# Altium PCB INSGPS.PcbDoc
Units mm, origin at the board's own origin, x right, y up, seen from the top; angles counter-clockwise.
Board outline 35 x 35 mm, 2 copper layers (Top Layer, Bottom Layer), stack 1.581 mm thick; 48 components, 44 nets, 286 pads, 62 vias.
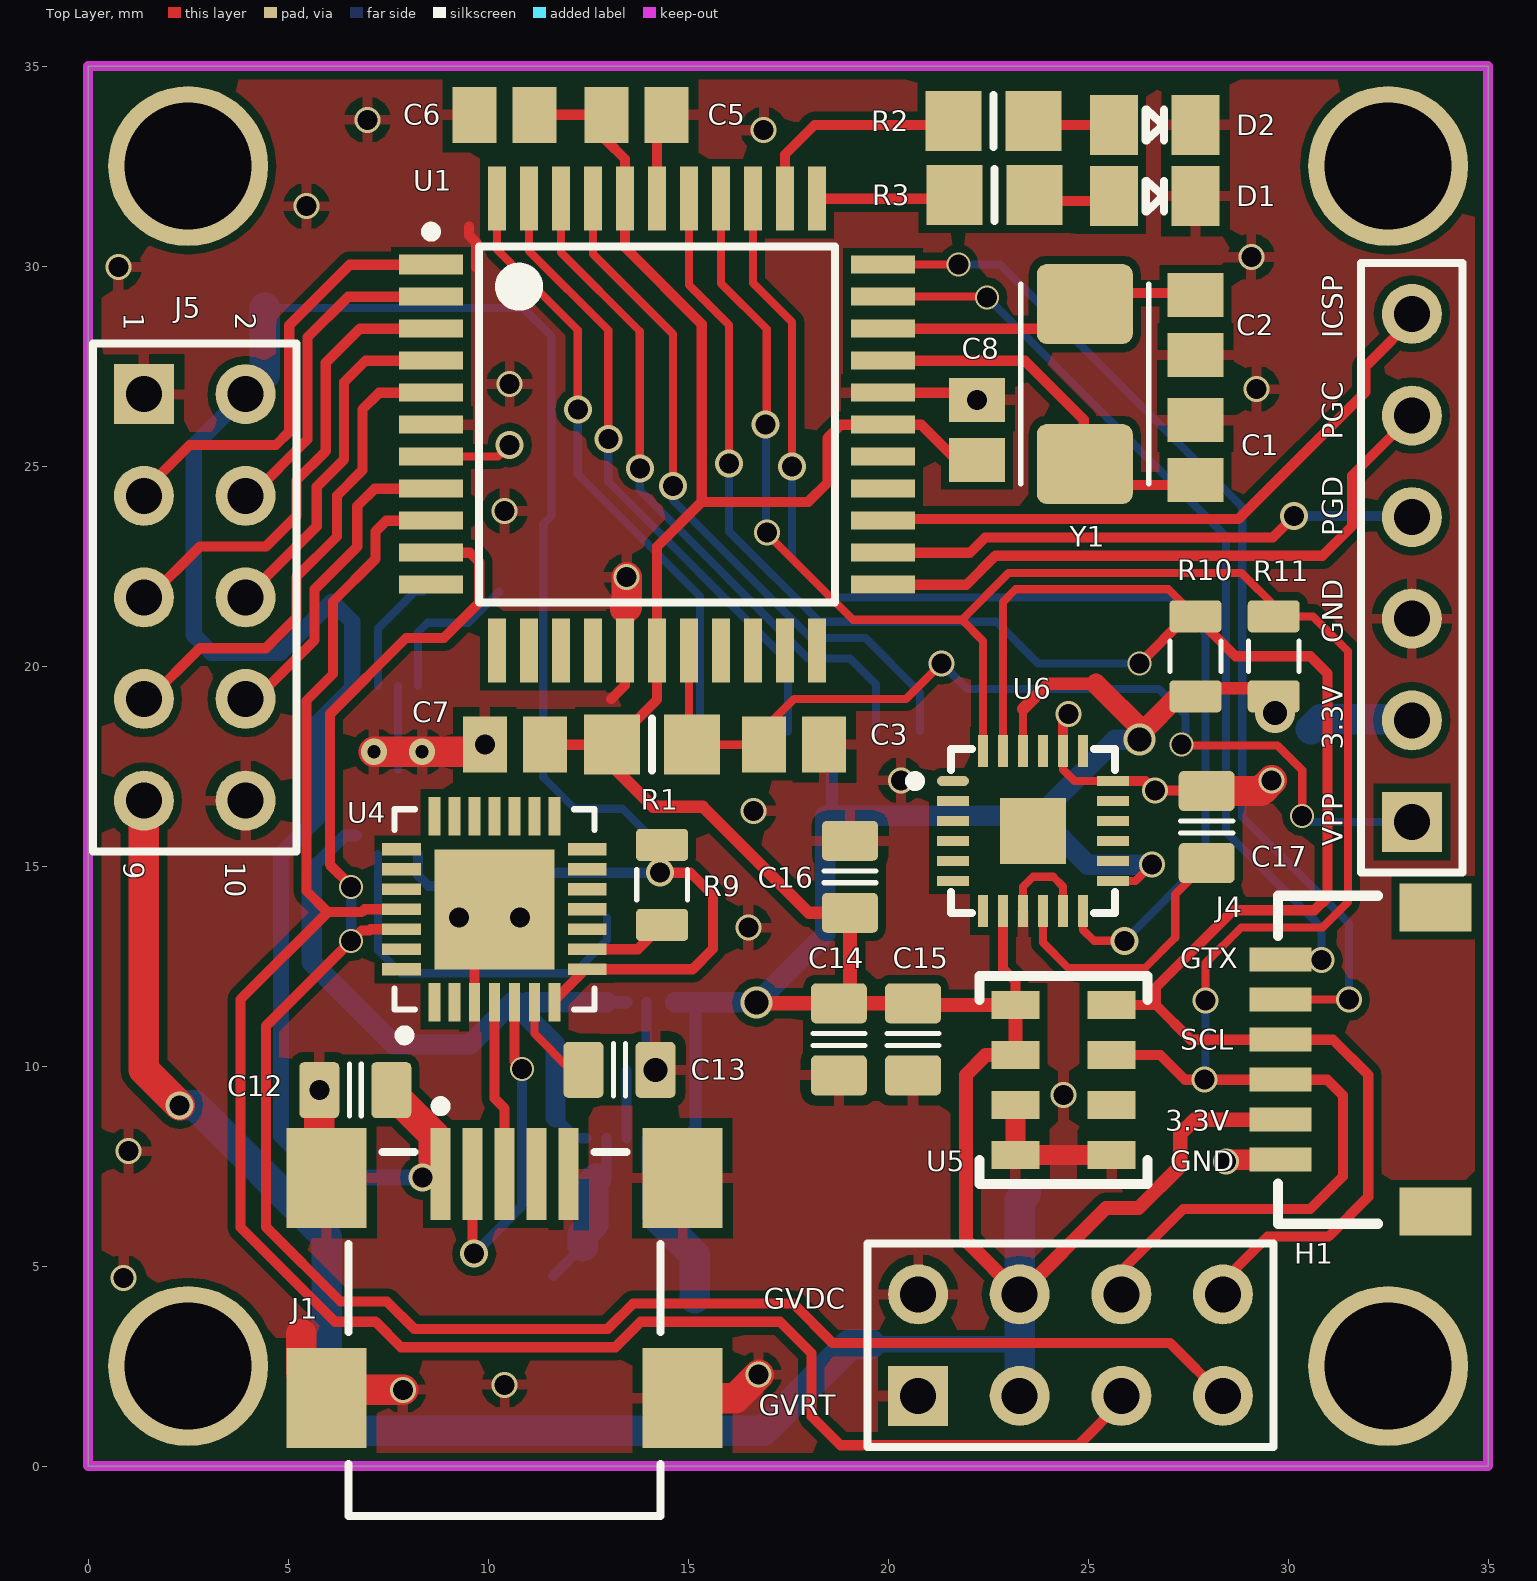
[diagram p0: Top Layer view]
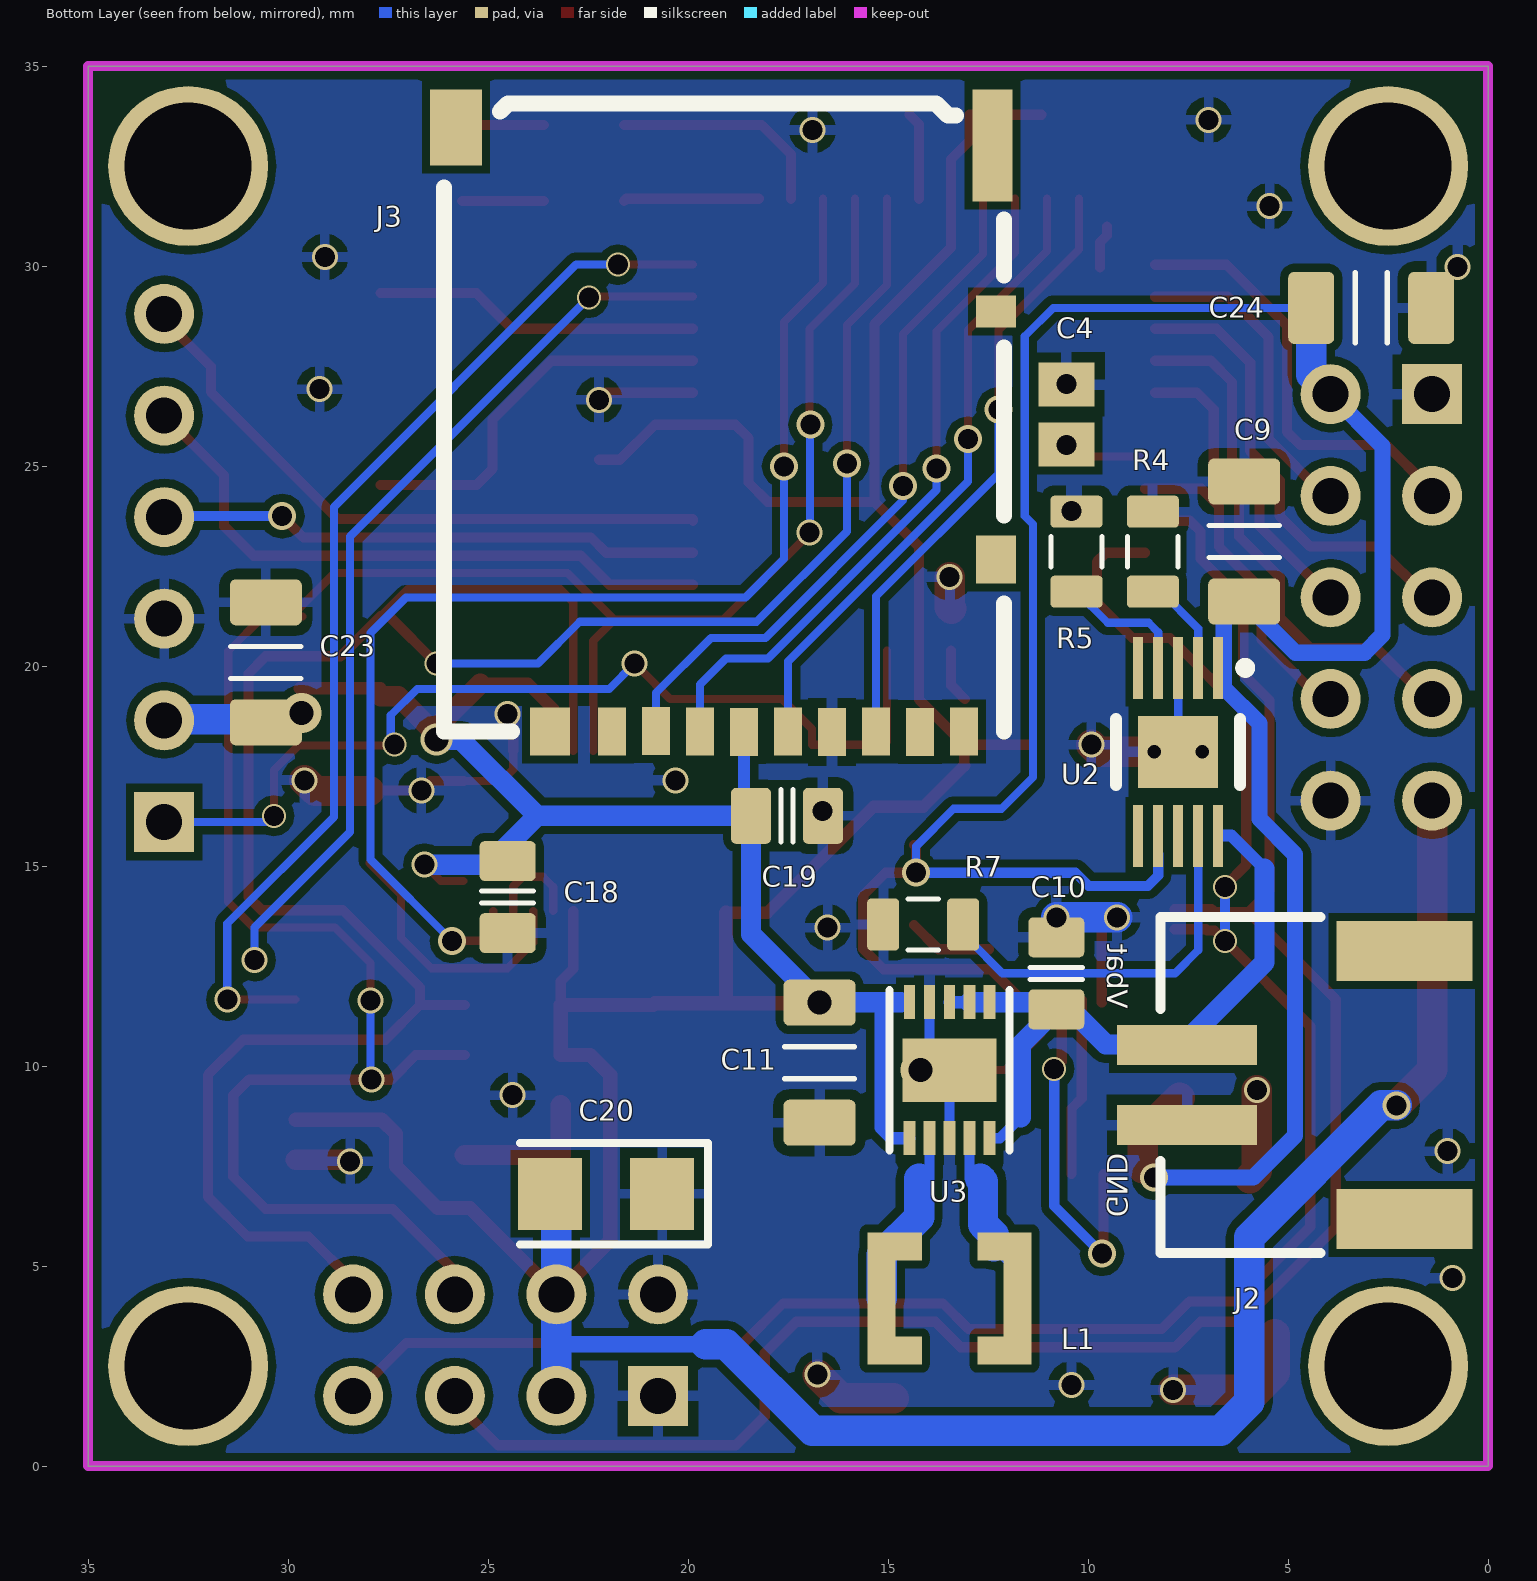
[diagram p1: Bottom Layer view, seen from below]

## Layer stack, top to bottom
Top Solder: solder mask 0.0102, Solder Resist, Dk 3.5
Top Layer: signal copper 0.0356
Dielectric 1: dielectric 1.51, FR-4, Dk 4.8
Bottom Layer: signal copper 0.0356
Bottom Solder: solder mask 0.0102, Solder Resist, Dk 3.5

## Board outline
0,0 35,0 35,35 0,35

## Design rules (kind name [scope] priority, off if disabled: settings)
Clearance [All] p1: gap=0.203
PlaneConnect [All] p1: planeconnectstyle=Relief reliefexpansion=0.508 reliefentries=4 reliefconductorwidth=0.406 reliefairgap=0.254
PolygonConnect [All] p1: connectstyle=Relief reliefconductorwidth=0.254 reliefentries=4 polygonreliefangle="90 Angle" airgapwidth=0.254
RoutingVias [All] p1: holewidth=0.6 width=0.8 viastyle="Through Hole" minholewidth=0.4 minwidth=0.5 maxholewidth=4 maxwidth=7
SolderMaskExpansion [All] p1: expansion=0.102
Width [All] p1: maxlimit=0.762 minlimit=0.203 preferedwidth=0.254 minimp=50.000000 maximp=50.000000 favimp=50.000000
29 further rules are at their usual default settings.

## Components (designator, comment, footprint, x,y, rotation, side; value= is the part's Value field where it differs from the comment)
C1 "15pF" C0805 27.686,25.4 r270 top
C2 "15pF" C0805 27.686,28.524 r90 top
C3 "100nF" C0805 17.653,18.034 r180 top
C4 "10uF" C0805 10.541,26.289 r270 bottom
C5 "100nF" C0805 13.716,33.782 r180 top
C6 "100nF" C0805 10.414,33.782 r180 top
C7 "100nF" C0805 10.668,18.034 r0 top
C8 "100nF" C0805 22.225,25.908 r270 top
C9 "10µ" CAPC3216X180N 6.096,23.114 r90 bottom
C10 "4µ7" CAPC2012X135N 10.795,12.319 r90 bottom
C11 "10µ" CAPC3216X180N 16.713,10.084 r270 bottom
C12 "100n" CAPC2012X135N 6.68,9.398 r180 top
C13 "100n" CAPC2012X135N 13.284,9.906 r180 top
C14 "10n" CAPC2012X135N 18.771,10.668 r270 top
C15 "100n" CAPC2012X135N 20.625,10.668 r270 top
C16 "10n" CAPC2012X135N 19.05,14.732 r90 top
C17 "100n" CAPC2012X135N 27.965,15.977 r90 top
C18 "100n" CAPC2012X135N 24.511,14.224 r270 bottom
C19 "100n" CAPC2012X135N 17.526,16.256 r180 bottom
C20 "1uF" CC3216-1206 22.047,6.807 r180 bottom
C23 "10µ" CAPC3216X180N 30.556,20.091 r90 bottom
C24 "10µ" CAPC3216X180N 2.921,28.956 r0 bottom
D1 "Red" "0805 LED RED" 26.67,31.75 r0 top
D2 "Blue" "0805 LED RED" 26.67,33.528 r0 top
H1 "Header 4X2" HDR2X4 20.752,1.753 r0 top
ICSP "Header 6" HDR1X6 33.096,16.104 r90 top
J1 "USB_MINIB_SMT" USB_MINIB_SMT 10.414,4.699 r0 top
J2 "ST 2 pins 1mm pitch" S2B-PH-K-S 5.588,9.525 r90 bottom
J3 "MicroSD" "SD CARD" 19.05,25.908 r90 bottom
J4 "6 position JST-SH SMD" SM06B-SRSS-TB 31.75,10.16 r90 top
J5 "Header 5X2" HDR2X5 1.397,26.797 r270 top
L1 "1.5µH" IND_COILCRAFT_LPS3015 13.462,4.191 r0 bottom
R1 "100k" 6-0805_M 14.097,18.034 r180 top
R2 "1k" 6-0805_M 22.631,33.63 r0 top
R3 "1k" 6-0805_M 22.657,31.775 r0 top
R4 "1K" RESC2012X70N 8.382,22.86 r90 bottom
R5 "2K" RESC2012X70N 10.287,22.86 r90 bottom
R7 "10K" RESC2012X70N 14.122,13.538 r0 bottom
R9 "10K" RESC2012X70N 14.351,14.529 r270 top
R10 "10K" RESC2012X70N 27.686,20.244 r90 top
R11 "10K" RESC2012X70N 29.642,20.244 r90 top
U1 "DSPIC33EP512GM604-I/PT" TQFP-44 14.224,26.035 r0 top
U2 "BQ24091" 10MSOP-PowerPAD 7.747,17.856 r270 bottom
U3 "TPS63001" "TDFN-EP 10" 13.463,9.896 r180 bottom
U4 "CP2102" QFN50P400X400X95-28N 10.16,13.919 r90 top
U5 "MS5611" MS5611 24.384,9.652 r0 top
U6 "MPU9250" QFN50P400X400X95-24N 23.622,15.875 r0 top
Y1 "XTAL" "CRYSTAL_NX5032GA / NX5032GB" 24.917,27.051 r90 top

## Footprints (in the part's own frame and the unit in brackets; to place one, negate y for a bottom-side part, rotate by r counter-clockwise, add the part's x,y. Pads: shape width x height; smd on the part's side, far side on the other; paste and mask are expansions set on the pad)
6-0805_M [mm] "Chip Resistor, Body 2.0x1.2mm, IPC Low Density"
  rect 1.4x1.5 smd: 1(-1,0) 2(1,0)
  silkscreen extent 0,-0.65 0,0.65, body extent -1.07,-0.7 1.07,0.7, height 0.7
10MSOP-PowerPAD [mm] "MSOP, 10-Leads, Body 3,1x3,1mm (max), Pitch 0,50mm, IPC Medium Density"
  rect 1.55x0.25 smd: 1(-2.1,1) 2(-2.1,0.5) 3(-2.1,0) 4(-2.1,-0.5) 5(-2.1,-1) 6(2.1,-1) 7(2.1,-0.5) 8(2.1,0) 9(2.1,0.5) 10(2.1,1)
  rect 1.8x2 smd: 3(0,0)
  silkscreen extent -2.22,-1.55 0.82,1.8, body extent -1.55,-1.55 1.55,1.55, height 1.1
"0805 LED RED" [mm] "LED 0805 RED"
  rect 1.2x1.5 smd: 1(-1.016,0) 2(1.016,0)
  silkscreen extent -0.23,-0.38 0.23,0.38, body extent -1.01,-0.62 1.01,0.63, height 1.15
C0805 [mm] "Chip Capacitor, Body 2.0x1.3mm, IPC High Density"
  rect 1.1x1.4 smd: 1(-0.75,0) 2(0.75,0)
  body extent -1.1,-0.72 1.1,0.72, height 1.4
CAPC2012X135N [mm] "Chip Capacitor, Body 2.0x1.2mm, EIA 0805, IPC Medium Density"
  round 0.254 on Mech15: 0(0,0)
  rrect25% 1x1.4 smd: 1(-0.9,0) 2(0.9,0)
  Top Layer pour cut-out: -0.675,0.7 -0.475,0.9 0.475,0.9 0.675,0.7 0.675,-0.7 0.475,-0.9 -0.475,-0.9 -0.675,-0.7
  silkscreen extent -0.15,-0.65 0.15,0.65, body extent -1.1,-0.72 1.1,0.73, height 1.34
CAPC3216X180N [mm] "Chip Capacitor, Body 3.2x1.6mm, 1.8mm H, EIA 1206, IPC Medium Density"
  round 0.508 on Mech15: 0(0,0)
  rrect25% 1.15x1.8 smd: 1(-1.5,0) 2(1.5,0)
  silkscreen extent -0.4,-0.88 0.4,0.88, body extent -1.7,-0.9 1.7,0.9, height 1.8
CC3216-1206 [mm] "Chip Capacitor; Body 3.2 x 1.6 mm (LxW typ)"
  rect 1.6x1.8 smd: 1(-1.4,0) 2(1.4,0)
  silkscreen extent -2.16,-1.27 2.54,1.27, body extent -2.16,-0.89 2.04,0.91, height 0.95
"CRYSTAL_NX5032GA / NX5032GB" [mm] "SMD Crystal 2-lead leadless package"
  round 0.508 on Mech15: 0(0,0)
  rrect25% 2x2.4 smd mask+0.075: 1(-2,0) 2(2,0)
  silkscreen extent -2.5,-1.6 2.5,1.6, body extent -2.5,-1.6 2.51,1.61, height 1.12
HDR1X6 [mm] "Connector; Header; 6 Position"
  rect 1.5x1.5 hole 0.9: 1(0,0)
  round 1.5 hole 0.9: 2(2.54,0) 3(5.08,0) 4(7.62,0) 5(10.16,0) 6(12.7,0)
  silkscreen extent -1.27,-1.27 13.97,1.27
HDR2X4 [mm] "Connector; Header; 4x2 Position"
  rect 1.5x1.5 hole 0.9: 1(0,0)
  round 1.5 hole 0.9: 2(0,2.54) 3(2.54,0) 4(2.54,2.54) 5(5.08,0) 6(5.08,2.54) 7(7.62,0) 8(7.62,2.54)
  silkscreen extent -1.27,-1.27 8.89,3.81
HDR2X5 [mm] "Connector; Header; 5x2 Position"
  rect 1.5x1.5 hole 0.9: 1(0,0)
  round 1.5 hole 0.9: 2(0,2.54) 3(2.54,0) 4(2.54,2.54) 5(5.08,0) 6(5.08,2.54) 7(7.62,0) 8(7.62,2.54) 9(10.16,0) 10(10.16,2.54)
  silkscreen extent -1.27,-1.27 11.43,3.81
IND_COILCRAFT_LPS3015 [mm] "Shielded Power Inductor, Body 3.0x3.0x1.5mm"
  round 0.5 on Mech15: 0(0,0)
  rrect1% 0.7x3.3 smd: 1(-1.7,0) 2(1.7,0)
  rrect1% 0.812x0.7 smd: 1(-1.1,-1.3) 1(-1.1,1.3) 2(1.1,-1.3) 2(1.1,1.3)
  body extent -1.58,-1.58 1.58,1.58, height 1.5
MS5611 [mm] "Sensor digital de presion absoluta"
  rect 1.2x0.7 smd: 1(-1.2,1.875) 2(-1.2,0.625) 3(-1.2,-0.625) 4(-1.2,-1.875) 5(1.2,-1.875) 6(1.2,-0.625) 7(1.2,0.625) 8(1.2,1.875)
  silkscreen extent -2.1,-2.6 2.1,2.6, body extent -1.5,-2.5 1.5,2.5, height 1.7
QFN50P400X400X95-24N [mm] "QFN, 24-Leads, Body 4,1x4,1mm (max), Pitch 0,50mm, IPC Medium Density"
  oval 0.8x0.25 smd: 1(-2,1.25)
  rect 0.8x0.25 smd: 2(-2,0.75) 3(-2,0.25) 4(-2,-0.25) 5(-2,-0.75) 6(-2,-1.25) 13(2,-1.25) 14(2,-0.75) 15(2,-0.25) 16(2,0.25) 17(2,0.75) 18(2,1.25)
  rect 0.25x0.8 smd: 7(-1.25,-2) 8(-0.75,-2) 9(-0.25,-2) 10(0.25,-2) 11(0.75,-2) 12(1.25,-2) 19(1.25,2) 20(0.75,2) 21(0.25,2) 22(-0.25,2) 23(-0.75,2) 24(-1.25,2)
  rect 1.65x1.65 smd: 25(0,0)
  silkscreen extent -3.07,-2.05 2.05,2.05, body extent -2,-2 2,2, height 0.9
QFN50P400X400X95-28N [mil] "QFN, 24-Leads, Body 4,1x4,1mm (max), Pitch 0,50mm, IPC Medium Density"
  rect 38x12 smd mask+5: 1(-91.5,59.06) 2(-91.5,39.37) 7(-91.5,-59.06) 15(91.5,-59.06) 16(91.5,-39.37) 17(91.5,-19.68) 18(91.5,0) 19(91.5,19.68) 20(91.5,39.37) 21(91.5,59.06)
  rect 38x11 smd mask+5: 3(-91.5,19.68) 4(-91.5,0) 5(-91.5,-19.68) 6(-91.5,-39.37)
  rect 11.5x38 smd mask+5: 8(-59.06,-91.5) 9(-39.37,-91.5) 25(0,91.5) 26(-19.68,91.5)
  rect 11x38 smd mask+5: 10(-19.68,-91.5) 24(19.68,91.5) 27(-39.37,91.5)
  rect 12x38 smd mask+5: 11(0,-91.5) 12(19.68,-91.5) 13(39.37,-91.5) 14(59.06,-91.5) 22(59.06,91.5) 23(39.37,91.5) 28(-59.06,91.5)
  rect 118.11x118.11 smd mask-65.5: 29(0,0)
  silkscreen extent -129,-98 98,98, body extent -98,-98 98,98, height 39
RESC2012X70N [mm] "Chip Resistor, Body 2.0x1.2mm, EIA 0805, IPC Medium Density"
  round 0.254 on Mech15: 0(0,0)
  rrect25% 0.8x1.3 smd: 1(-1,0) 2(1,0)
  Top Layer pour cut-out: -0.725,0.65 -0.525,0.85 0.525,0.85 0.725,0.65 0.725,-0.65 0.525,-0.85 -0.525,-0.85 -0.725,-0.65
  silkscreen extent -0.38,-0.64 0.38,0.64, body extent -1.1,-0.67 1.1,0.68, height 0.69
S2B-PH-K-S [mm] "2 pin 2.00 mm pitch crimp style connector"
  rect 1.5x3.4 smd: 0(-3.35,-3.5) 0(3.35,-3.5)
  rect 1x3.5 smd: 1(1,1.938) 2(-1,1.938)
  silkscreen extent -4.2,-1.4 4.2,2.6, body extent -3.95,-5.1 3.95,3.5, height 5.5
"SD CARD" [mm]
  rect 1.2x1 smd: 0(-7.545,4.4) 0(-3.245,-6.75)
  rect 2.8x1 smd: 0(7.105,-6.66)
  rect 1.9x1.3 smd: 0(7.555,6.75)
  rect 1.2x0.7 smd: 1(-7.545,2.85) 2(-7.535,1.75) 3(-7.545,0.65) 4(-7.555,-0.45) 5(-7.545,-1.55) 6(-7.555,-2.65) 7(-7.545,-3.75) 8(-7.555,-4.85) 10(-7.545,-5.95)
  rect 0.8x1 smd: 9(2.955,-6.75)
  silkscreen extent -7.54,-6.95 8.16,7.05, body extent -7.52,-7.39 7.43,7.55, height 1.53
SM06B-SRSS-TB [mm] "6 pin 1.00 mm pitch crimp style connector"
  rect 1.2x1.8 smd: 0(-3.8,-1.937) 0(3.8,-1.937)
  rect 0.6x1.55 smd: 1(2.5,1.938) 2(1.5,1.938) 3(0.5,1.938) 4(-0.5,1.938) 5(-1.5,1.938) 6(-2.5,1.938)
  silkscreen extent -4.1,-0.5 4.1,2, body extent -4,-2.6 4,2.35, height 2.9
"TDFN-EP 10" [mm] "Opto Plastic Very Very Thin Dual Flatpack, No Leads TDFN"
  rect 2.35x1.58 smd paste+0 mask+0.05: 0(0,0)
  rect 0.3x0.85 smd paste+0 mask+0.05: 1(-1,-1.7) 5(1,-1.7) 6(1,1.7) 7(0.5,1.7)
  rect 0.292x0.85 smd paste+0 mask+0.05: 2(-0.5,-1.7) 3(0,-1.7) 4(0.5,-1.7)
  rect 0.279x0.85 smd paste+0 mask+0.05: 8(0,1.7) 9(-0.5,1.7) 10(-1,1.7)
  silkscreen extent -1.5,-2 1.5,2, body extent -1.5,-1.51 1.5,1.5, height 0.73
TQFP-44 [mm] "44-Lead Plastic Thin Quad Flatpack (PT) – 10x10x1 mm Body, 2.00 mm Footprint [TQFP]"
  rect 1.6x0.5 smd: 1(-5.65,4)
  rect 1.6x0.45 smd: 2(-5.65,3.2) 3(-5.65,2.4) 4(-5.65,1.6) 5(-5.65,0.8) 6(-5.65,0) 7(-5.65,-0.8) 8(-5.65,-1.6) 9(-5.65,-2.4) 10(-5.65,-3.2) 11(-5.65,-4) 23(5.65,-4) 24(5.65,-3.2) 25(5.65,-2.4) 26(5.65,-1.6) 27(5.65,-0.8) 28(5.65,0) 29(5.65,0.8) 30(5.65,1.6) 31(5.65,2.4) 32(5.65,3.2) 33(5.65,4)
  rect 0.45x1.6 smd: 12(-4,-5.65) 13(-3.2,-5.65) 14(-2.4,-5.65) 15(-1.6,-5.65) 16(-0.8,-5.65) 17(0,-5.65) 18(0.8,-5.65) 19(1.6,-5.65) 20(2.4,-5.65) 21(3.2,-5.65) 22(4,-5.65) 34(4,5.65) 35(3.2,5.65) 36(2.4,5.65) 37(1.6,5.65) 38(0.8,5.65) 39(0,5.65) 40(-0.8,5.65) 41(-1.6,5.65) 42(-2.4,5.65) 43(-3.2,5.65) 44(-4,5.65)
  silkscreen extent -5.77,-4.45 4.45,4.95, body extent -6,-6 6,6, height 1.1
USB_MINIB_SMT [mm]
  rect 0.5x2.3 smd: 1(-1.6,2.6) 2(-0.8,2.6) 3(0,2.6) 4(0.8,2.6) 5(1.6,2.6)
  rect 2x2.5 smd: 6(4.45,2.5) 7(4.45,-3) 8(-4.45,2.5) 9(-4.45,-3)
  silkscreen extent -3.9,-5.95 3.9,4.42, body extent -5.35,-5.9 5.35,3.3, height 3.95

## Part data
C1 C2 C3 C4 C5 C6 C7 C8: library part Cap, "Capacitor"
C9 C11 C23 C24: library part CAPC_10u_1206_10V, "Capacitor SMD Cer 10uF 10% 10V X5R 1206"
C10: library part CAPC_4u7_0805, "Capacitor SMD Cer 4.7uF 10% 16V X5R 0805"
C12 C13 C14 C15 C16 C17 C18 C19: library part CAPC_100n_0805_X7R_100V_10%, "Capacitor SMD Cer 100nF 10% 100V X7R 0805"
C20: library part Cap2, "Capacitor Tantalium 1206"
D1 D2: library part LED3, "Typical BLUE SiC LED"
H1: "Header, 4-Pin, Dual row"
ICSP: "Header, 6-Pin"
J1: "MiniUSB-B,5P/F,7.6¡Á9¡Á4,SMD,RoHS"
J2: library part 2P_TERM_BLOCK_HEADER, "Terminal Block THT 2-position header 3.81mm pitch"
J4: library part "6P_TERM BLOCK HEADER", "JST-SH, 6-Position connector, 1mm pitch"
J5: "Header, 5-Pin, Dual row"
L1: library part INDC_10u_LowRDC, "Inductor SMD Low DCR 10 µH 900mA 20% 1210"
R1 R2 R3: library part Res1, "Chip Resistor 0805"
R4 R5 R7 R9 R10 R11: library part RES_1K_0805_1%, "Resistor SMD chip 1k Ohm 0.125W 1% 0805"
U1: "16-Bit Digital Signal Controllers with High-Speed PWM, Op Amps and Advanced Analog Features, 70 MIPS, 35 I/O, Industrial Temperature, 44-Pin TQFP (PT44), Tray"
U2: library part BQ2409X
U3: library part TPS6303X
U5: "Sensor digital de presion barometrica absoluta con interfaz I2C"
U6: "The MPU-9250 is the world’s first integrated 9-axis MotionTracking device that combines a 3-axis   gyroscope, 3-axis accelerometer, and a Digital Motion Processor™ (DMP) all in a small 4x4x0.9mm   package."
Y1: "Crystal Oscillator"

## Free pads (board coordinates)
  round 4 hole 3.17: 0(2.5,2.5) 0(2.5,32.5) 0(32.5,2.5) 0(32.5,32.5)

## Via types
v1: diameter 0.65, hole 0.5, Top Layer to Bottom Layer, 34 vias
v2: diameter 0.7, hole 0.5, Top Layer to Bottom Layer, 14 vias
v3: diameter 0.6, hole 0.5, Top Layer to Bottom Layer, 8 vias
v4: diameter 0.66, hole 0.33, Top Layer to Bottom Layer, tented top, 2 vias
v5: diameter 1, hole 0.6, Top Layer to Bottom Layer, 2 vias
v6: diameter 0.8, hole 0.6, Top Layer to Bottom Layer, 2 vias

## Nets (pads, with @x,y where several pads share a name; then routed paths per layer and width w, separated by ;. In a path a pad name is that pad's centre, name@x,y a point inside that pad or via, vN(x,y) a via of type N, cw(c..) or ccw(c..) an arc to the next point about the centre after c; other vN are vias at no path point)
3.3V: C5.2 C6.1 C7.2 C8.2 C11.1 C14.1 C15.1 C16.1 C18.1 C19.1 C20.1 C23.1 H1.3 H1.4 ICSP.2 J3.4 J4.5 J5.9 R1.2 R10.1 R11.1 U1.17 U1.28 U1.40 U3.1 U3.10 U5.1 U5.2 U6.8 U6.13 U6.22 | length 145.4
  Top Layer w0.203: U6.22 23.372,18.927 ; U6.13 26.182,14.625 v1(26.594,15.037)
  Top Layer w0.254: C6.1 C5.2 12.966,33.135 13.424,32.677 U1.40 13.424,30.467 15.342,28.55 15.342,24.105 ; C7.2 R1.2 ; R1.2@13.097,17.51 R1.2 ; C8.2 21.705,25.158 20.828,26.035 U1.28 18.821,26.035 18.491,25.705 18.491,24.587 18.009,24.105 15.342,24.105 ; U6.8 22.872,12.434 23.184,12.122 U5.1 ; R1.2 14.224,19.161 U1.17 14.224,22.987 15.342,24.105
  Top Layer w0.305: R1.2@13.097,17.51 14.122,16.485 15.367,16.485 18.02,13.832 C16.1 ; 23.372,18.927 24.003,19.558 25.197,19.558 ; R10.1@27.686,19.447 R11.1@29.718,19.447
  Top Layer w0.356: v6(16.713,11.584) 16.729,11.568 C14.1@19.05,11.568 ; C16.1 C14.1@19.05,11.568 ; J4.5 27.659,8.66 27.305,8.306 27.305,7.493 26.264,6.452 25.451,6.452 H1.4 21.946,5.639 21.946,9.779 22.444,10.277 U5.2 U5.1 20.869,11.527 20.828,11.568 C14.1@19.05,11.568
  Top Layer w0.508: 25.197,19.558 26.378,18.377 27.245,19.244 R10.1
  Top Layer w0.762: J5.9 1.397,9.906 v2(2.286,9.017)
  Bottom Layer w0.305: U3.1 14.927,8.196 15.189,8.458 15.189,11.596 ; C19.1 18.6,16.43 J3.4
  Bottom Layer w0.406: 19.558,3.048 23.292,3.048
  Bottom Layer w0.508: 14.681,11.596 15.189,11.596 16.498,11.596 C11.1@16.51,11.584 ; v6(16.713,11.584) 18.426,13.297 C19.1 23.774,16.256 ; v6(26.289,18.161) 25.679,18.161 23.774,16.256 ; v1(26.594,15.037) 24.994,15.037 23.774,16.256
  Bottom Layer w0.762: v2(2.286,9.017) 2.667,9.017 5.969,5.715 5.969,1.6 6.68,0.889 16.891,0.889 19.05,3.048 19.558,3.048 ; H1.3@23.292,1.524 H1.3 23.292,3.048 H1.4 23.292,6.652 C20.1 ; C23.1@30.568,18.422 30.815,18.669 ICSP.2@33.274,18.669
  other v5: 29.667,18.821
AD0: U1.19
AD1: U1.20
AUX: ICSP.6 U1.25 | length 15.9
  Top Layer w0.254: U1.25 19.874,23.673 28.753,23.673 31.928,26.848 31.928,27.483 ICSP.6@33.274,28.829
CS: J3.2 U1.41 | length 17.5
  Top Layer w0.203: U1.41 12.624,30.302 14.623,28.303 v2(14.623,24.497)
  Bottom Layer w0.203: v2(14.623,24.497) 14.623,24.145 18.068,20.701 19.431,20.701 20.8,19.332 J3.2
D1: R3.1 U1.34 | length 3.4
  Top Layer w0.254: U1.34 21.544,31.685 R3.1@21.606,31.623
D2: R2.1 U1.35 | length 5.6
  Top Layer w0.254: U1.35 17.424,32.791 18.161,33.528 R2.1@21.606,33.528
D+: J1.3 U4.4 | length 4.5
  Top Layer w0.254: U4.4@10.16,11.646 10.16,9.195 10.414,8.941 J1.3
D-: J1.2 U4.5 | length 9
  Top Layer w0.254: J1.2 9.614,5.347 v2(9.652,5.309) ; U4.5@10.66,11.646 10.66,10.117 v3(10.846,9.931) 10.77,9.855 v3@10.77,9.83
  Bottom Layer w0.254: v2(9.652,5.309) 10.846,6.502 v3(10.846,9.931)
GND: C1.1 C2.1 C3.1 C4.1 C5.1 C6.2 C7.1 C8.1 C9.2 C10.2 C11.2 C12.2 C13.1 C14.2 C15.2 C16.2 C17.2 C18.2 C19.2 C20.2 C23.2 C24.1 D1.2 D2.2 H1.1 H1.2 ICSP.3 J1.5 J1.6 J1.7 J1.8 J1.9 J2.2 J3.6 J4.6 J5.1 J5.10 R4.2 R5.2 R7.2 U1.6 U1.16 U1.29 U1.39 U2.3 U3.0 U3.3 U3.9 U4.3 U4.29 U5.3 U5.4 U5.5 U6.9 U6.11 U6.18 U6.20 | length 43.1
  Top Layer w0.203: U6.9 23.372,14.482 23.622,14.732 24.13,14.732 24.372,14.49 U6.11 ; U6.20 24.372,17.411 24.658,17.125 U6.18
  Top Layer w0.254: 9.525,30.988 9.525,30.769 9.704,30.589 9.704,29.972 ; U4.3 9.66,13.419 U4.29 ; 13.081,19.177 13.424,19.52 U1.16 ; U1.39 14.224,33.54 C5.1 ; U1.29 22.048,26.835 v1(22.225,26.658) ; U6.20 24.372,18.657 v1(24.511,18.796) ; U6.18 26.436,17.125 v1(26.67,16.891) 27.951,16.891 C17.2
  Top Layer w0.508: U5.3 U5.4 U5.5 ; v1(28.448,7.62) 28.488,7.66 J4.6
  Top Layer w0.762: 5.334,3.302 5.334,2.329 J1.9 6.17,1.905 v1(7.874,1.905) ; v1(5.78,9.398) 5.78,7.383 J1.8 ; v4(7.147,17.856) v4(8.347,17.856) 9.74,17.856 v1(9.918,18.034) ; 13.424,21.436 13.462,21.474 v1(13.462,22.225) ; J1.7 16.177,1.699 v1(16.764,2.286) ; C17.2 29.323,16.877 v1(29.591,17.145)
  Bottom Layer w0.203: U2.3@7.747,17.399 7.747,17.856 U2.3@7.747,19.499
  Bottom Layer w0.254: U3.3 U3.0 ; U3.9 13.963,10.396 14.184,10.175 v5(14.184,9.906)
  Bottom Layer w0.762: v1(9.271,13.716) v1(10.795,13.716)
  other v1: 10.414,2.032 0.889,4.699 1.016,7.874 24.384,9.271 16.51,13.462 16.637,16.383 20.32,17.145 10.414,23.876 29.21,26.924 10.541,27.051 0.762,29.972 29.083,30.226 5.461,31.496 16.891,33.401 6.985,33.655
GPIO1: J5.3 U1.1 | length 10.9
  Top Layer w0.254: J5.3@1.524,24.257 1.524,24.511 2.54,25.527 4.699,25.527 5.029,25.857 5.029,28.524 6.54,30.035 U1.1@8.32,30.035
GPIO2: J5.4 U1.2 | length 7.8
  Top Layer w0.254: J5.4@4.064,24.257 4.076,24.257 5.486,25.668 5.486,28.219 6.502,29.235 U1.2@8.32,29.235
GPIO3: J5.5 U1.3 | length 11.4
  Top Layer w0.254: J5.5@1.524,21.717 2.794,22.987 4.445,22.987 5.207,23.749 5.207,24.638 5.944,25.375 5.944,27.584 6.794,28.435 U1.3@8.32,28.435
GPIO4: J5.6 U1.4 | length 8.2
  Top Layer w0.254: J5.6@4.191,21.971 5.715,23.495 5.715,24.485 6.401,25.171 6.401,27.102 6.934,27.635 U1.4@8.32,27.635
GPIO5: J5.7 U1.5 | length 12.1
  Top Layer w0.254: J5.7@1.524,19.177 2.794,20.447 4.445,20.447 5.207,21.209 5.207,21.844 5.207,22.225 6.223,23.241 6.223,24.257 6.858,24.892 6.858,26.416 7.277,26.835 U1.5@8.32,26.835
GPIO6: J5.8 U1.8 | length 8.2
  Top Layer w0.254: J5.8 4.191,19.177 5.664,20.65 5.664,21.92 6.731,22.987 6.731,24.003 7.163,24.435 U1.8
GPSRX: J4.2 U1.33 | length 26.7
  Top Layer w0.203: U1.33 v3(21.755,30.035) v3@21.844,30.124 ; J4.2 v1(31.52,11.66)
  Bottom Layer w0.203: v3(21.755,30.035) 22.797,30.035 28.854,23.978 28.854,16.231 31.52,13.565 v1(31.52,11.66)
GPSTX: J4.1 U1.32 | length 22.6
  Top Layer w0.203: U1.32 v3@22.479,29.235
  Bottom Layer w0.203: v3(22.479,29.21) 28.448,23.241 28.448,15.85 30.836,13.462 v1(30.836,12.649)
INT: U1.36 U6.12 | length 30.7
  Top Layer w0.203: U1.36 16.624,29.579 17.602,28.6 v2(17.602,24.994) ; U6.12 24.872,13.406 25.146,13.132 v2(25.908,13.132)
  Bottom Layer w0.203: v2(17.602,24.994) 17.602,22.682 18.567,21.717 27.051,21.717 27.94,20.828 27.94,15.164 v2(25.908,13.132)
MISO: J3.7 U1.44 | length 15.4
  Top Layer w0.203: U1.44 10.224,30.416 12.243,28.397 v2(12.243,26.416)
  Bottom Layer w0.203: v2(12.243,26.416) 12.243,24.802 15.3,21.744 J3.7
MOSI: J3.3 U1.42 | length 17.2
  Top Layer w0.203: U1.42 11.824,30.34 13.792,28.372 13.792,27.508 v2(13.792,24.943)
  Bottom Layer w0.203: v2(13.792,24.943) 13.792,24.402 18.001,20.193 19.05,20.193 19.7,19.543 J3.3
NetC13_2: C13.2 U4.6 | length 2.4
  Top Layer w0.203: U4.6@11.16,11.646 11.16,10.811 12.065,9.906 C13.2
NetC17_1: C17.1 U6.10 | length 6.9
  Top Layer w0.203: U6.10 23.872,13.085 24.511,12.446 26.416,12.446 27.178,13.208 27.178,14.289 C17.1
NetD1_1: D1.1 R3.2 | length 2
  Top Layer w0.254: R3.2@23.606,31.623 D1.1@25.654,31.623
NetD2_1: D2.1 R2.2 | length 2
  Top Layer w0.254: R2.2@23.606,33.528 D2.1
NetL1_1: L1.1 U3.4 | length 3.9
  Bottom Layer w0.254: L1.1@11.626,4.755 L1.1@12.362,5.491 ; 12.963,7.187 U3.4
  Bottom Layer w0.762: L1.1@12.362,5.491 12.362,5.784 12.627,6.048 12.627,7.113 12.7,7.187
NetL1_2: L1.2 U3.2 | length 4.4
  Bottom Layer w0.254: 13.963,7.187 U3.2
  Bottom Layer w0.762: 14.224,7.187 14.224,6.223 15.162,5.285 L1.2@15.162,4.191
NetR4_1: R4.1 U2.2 | length 3
  Bottom Layer w0.203: U2.2@7.247,19.499 7.247,20.938 8.169,21.86 R4.1
NetR5_1: R5.1 U2.4 | length 3.8
  Bottom Layer w0.203: U2.4@8.247,19.499 8.247,20.845 8.484,21.082 9.509,21.082 R5.1
NetR7_1: R7.1 U2.9 | length 9.3
  Bottom Layer w0.203: U2.9@7.247,15.299 7.247,12.895 7.823,12.319 12.141,12.319 12.97,13.148 R7.1@12.97,13.716
NetR9_2: R9.2 U4.9 | length 2.1
  Top Layer w0.254: U4.9 13.741,12.919 R9.2
OSC1: C1.2 U1.30 Y1.1 | length 9.8
  Top Layer w0.254: U1.30 23.419,27.635 24.892,26.162 24.892,24.924 25.293,24.523 C1.2@27.686,24.523
OSC2: C2.2 U1.31 Y1.2 | length 8.2
  Top Layer w0.254: U1.31 24.403,28.435 24.892,28.924 25.293,29.325 C2.2@27.686,29.325
PGC: ICSP.5 U1.23 | length 15.7
  Top Layer w0.254: U1.23 21.959,22.035 22.682,22.758 30.861,22.758 31.598,23.495 31.598,24.765 ICSP.5
PGD: ICSP.4 U1.24 | length 13.8
  Top Layer w0.254: U1.24 22.048,22.835 22.428,23.216 29.616,23.216 v2(30.15,23.749)
  Bottom Layer w0.254: v2(30.15,23.749) ICSP.4@33.274,23.749
RX: H1.5 U1.9 U4.25 | length 48.8
  Top Layer w0.254: U4.25 6.911,13.919 6.84,13.848 5.99,13.848 ; U1.9 7.455,23.635 7.188,23.368 7.188,22.682 6.121,21.615 6.121,19.8 5.461,19.14 5.461,14.376 5.99,13.848 ; H1.5@25.832,1.6 24.752,0.52 18.809,0.52 18.085,1.245 18.085,2.819 17.297,3.607 13.818,3.607 13.183,2.972 7.823,2.972 7.188,3.607 6.172,3.607 3.81,5.969 3.81,11.668 5.99,13.848
SCK: J3.5 U1.43 | length 16
  Top Layer w0.203: U1.43 11.024,30.378 13.005,28.397 v2(13.005,25.679)
  Bottom Layer w0.203: v2(13.005,25.679) 13.005,24.614 17.5,20.119 J3.5
SCL: H1.8 J4.3 R10.2 U1.38 U5.8 U6.23 | length 61.6
  Top Layer w0.203: U1.38 15.024,29.528 16.027,28.524 v2(16.027,25.07) ; U6.23 22.872,21.602 23.19,21.92 27.01,21.92 R10.2
  Top Layer w0.254: U5.8 26.7,11.527 ; v3(26.289,20.066) 27.467,21.244 R10.2 28.686,20.244 30.556,20.244 30.988,19.812 30.988,14.224 30.658,13.894 28.626,13.894 26.7,11.968 26.7,11.527 ; H1.8@28.372,4.064 28.372,4.623 29.489,5.74 31.013,5.74 32.004,6.731 32.004,9.779 31.123,10.66 J4.3 27.567,10.66 26.7,11.527
  Bottom Layer w0.203: v2(16.027,25.07) 16.027,23.368 18.288,21.107 22.708,21.107 23.749,20.066 v3(26.289,20.066)
SDA: H1.6 J4.4 R11.2 U1.37 U5.7 U6.24 | length 57.3
  Top Layer w0.203: U1.37 15.824,29.566 16.967,28.423 16.967,26.06 v2(16.942,26.035) ; v1@16.954,23.33 19.126,21.158 21.844,21.158 ; U6.24 22.372,20.63 21.844,21.158 ; v1(27.94,11.633) 27.94,12.573 28.829,13.462 30.861,13.462 31.496,14.097 31.496,20.371 30.623,21.244 R11.2 ; R11.2@29.718,21.447 28.838,22.327 23.012,22.327 21.844,21.158
  Top Layer w0.254: U5.7 26.807,10.277 27.424,9.66 v1(27.915,9.66) J4.4 30.98,9.66 31.369,9.271 31.369,7.239 30.556,6.426 27.381,6.426 25.832,4.877 H1.6@25.832,4.775
  Bottom Layer w0.203: v2(16.942,26.035) 16.947,26.029 16.947,23.362 v1(16.967,23.343) ; v1(27.915,9.66) 27.94,9.685 v1(27.94,11.633)
TX: H1.7 U1.10 U4.26 | length 48.7
  Top Layer w0.254: v3(6.579,14.478) 6.579,14.503 6.045,15.037 6.045,18.796 7.95,20.701 8.89,20.701 9.779,21.59 9.779,22.606 9.55,22.835 U1.10 ; U4.26 7.058,13.419 7.029,13.391 6.837,13.391 v3(6.579,13.132) 4.445,10.998 4.445,5.981 6.311,4.115 7.468,4.115 8.153,3.429 12.993,3.429 13.628,4.064 17.628,4.064 18.618,3.073 27.051,3.073 H1.7
  Bottom Layer w0.254: v3(6.579,13.132) v3(6.579,14.478)
VBAT: C10.1 J2.1 U2.10 U3.5 U3.6 U3.7 U3.8 | length 17
  Bottom Layer w0.254: 11.684,8.721 12.209,8.196 U3.5
  Bottom Layer w0.305: 5.588,14.935 6.413,15.761 U2.10@6.693,15.761 ; U3.7 U3.8
  Bottom Layer w0.508: 5.588,14.935 5.588,12.59 7.637,10.541 9.555,10.541 C10.1@10.66,11.646 ; 11.684,8.721 11.684,10.53 C10.1 10.972,11.596 U3.6 U3.7
VCAP: C4.2 U1.7 | length 2.1
  Top Layer w0.203: U1.7 10.249,25.235 v2(10.541,25.527)
VCC: C9.1 C12.1 C24.2 J1.1 J5.2 R9.1 U2.1 U2.7 U4.7 U4.8 | length 71.3
  Top Layer w0.254: U4.7@11.66,11.646 12.435,12.421 15.113,12.421 15.621,12.929 15.621,14.275 15.062,14.834 v2(14.3,14.834) 14.3,15.478 R9.1
  Top Layer w0.762: C12.1@7.704,9.212 8.636,8.28 J1.1@8.636,7.442
  Bottom Layer w0.203: C24.2 10.871,28.956 11.582,28.245 11.582,23.749 11.379,23.546 11.379,17.221 12.167,16.434 13.36,16.434 14.3,15.494 v2(14.3,14.834)
  Bottom Layer w0.254: U2.7@8.247,15.299 8.247,14.765 8.509,14.503 9.982,14.503 10.312,14.834 v2(14.3,14.834)
  Bottom Layer w0.406: J5.2 2.642,25.502 2.642,20.777 3.085,20.333 4.815,20.333 C9.1 6.605,21.105 6.605,19.457 5.715,18.567 5.715,16.18 4.826,15.291 4.826,8.255 5.867,7.214 v2(8.357,7.214)
  Bottom Layer w0.762: J5.2 4.421,27.281 C24.2
VPP: C3.2 ICSP.1 R1.1 U1.18 | length 24.2
  Top Layer w0.203: U1.18 15.024,18.107 R1.1 C3.2 16.903,18.427 17.653,19.177 20.447,19.177 v1@21.209,19.939 ; v3(27.335,18.034) 27.353,18.017 29.735,18.017 30.353,17.399 v3(30.353,16.256)
  Bottom Layer w0.203: v1(21.336,20.066) 21.971,19.431 26.772,19.431 27.432,18.771 27.432,18.131 v3(27.335,18.034) v3@27.432,18.034 ; v3(30.353,16.256) 30.505,16.104 ICSP.1
pads on no net: C9.0 C10.0 C11.0 C12.0 C13.0 C14.0 C15.0 C16.0 C17.0 C18.0 C19.0 C23.0 C24.0 J1.4 J2.0 J3.0 J3.1 J3.8 J3.9 J3.10 J4.0 L1.0 R4.0 R5.0 R7.0 R9.0 R10.0 R11.0 U1.11 U1.12 U1.13 U1.14 U1.15 U1.21 U1.22 U1.26 U1.27 U2.5 U2.6 U2.8 U4.1 U4.2 U4.10 U4.11 U4.12 U4.13 U4.14 U4.15 U4.16 U4.17 U4.18 U4.19 U4.20 U4.21 U4.22 U4.23 U4.24 U4.27 U4.28 U5.6 U6.1 U6.2 U6.3 U6.4 U6.5 U6.6 U6.7 U6.14 U6.15 U6.16 U6.17 U6.19 U6.21 U6.25 Y1.0

## Polygon pours and split planes (outlines as drawn)
GND on Top Layer "Top Layer-GND" (solid, remove dead copper, pour order 8): 0,0 35,0 35,35 0,35
GND on Bottom Layer "Bottom Layer-GND" (solid, remove dead copper, pour order 11): 0,0 35,0 35,35 0,35

## Keep-outs
Keep-Out Layer:
  the board outline again, w0.254

## Silkscreen, mask and mechanical layers (free items; w line width, h text height)
Top Overlay:
  text "PGC" at 31.369,25.654 h0.51 r90
  text "PGD" at 31.369,23.241 h0.51 r90
  text "GND" at 31.369,20.574 h0.51 r90
  text "3.3V" at 31.369,17.907 h0.51 r90
  text "VPP" at 31.369,15.494 h0.51 r90
  text "GTX" at 27.305,12.446 h0.51
  text "SCL" at 27.305,10.414 h0.51
  text "3.3V" at 26.924,8.382 h0.51
  text "GND" at 27.051,7.366 h0.51
  text "GVDC" at 16.891,3.937 h0.51
  text "GVRT" at 16.764,1.27 h0.51
Bottom Overlay:
  text "Vbat" at 9.525,11.43 h0.51 r90
  text "GND" at 9.525,6.223 h0.51 r90
Mechanical 1:
  the board outline again, w0.254

## Dimensions
2.5,32.5 to 2.5,2.5 on Mechanical 15
35,0 to 35,35 on Mechanical 15
0,0 to 35,0 on Mechanical 15

## Text inside footprints (layer, text, board x,y; h text height)
J5: Top Overlay "10" at 3.429,15.113 h0.51 r270; Top Overlay "9" at 0.889,15.113 h0.51 r270; Top Overlay "1" at 0.889,28.829 h0.51 r270; Top Overlay "2" at 3.683,28.829 h0.51 r270